# EAGLE board saint lcd (EAGLE 9.4.2)
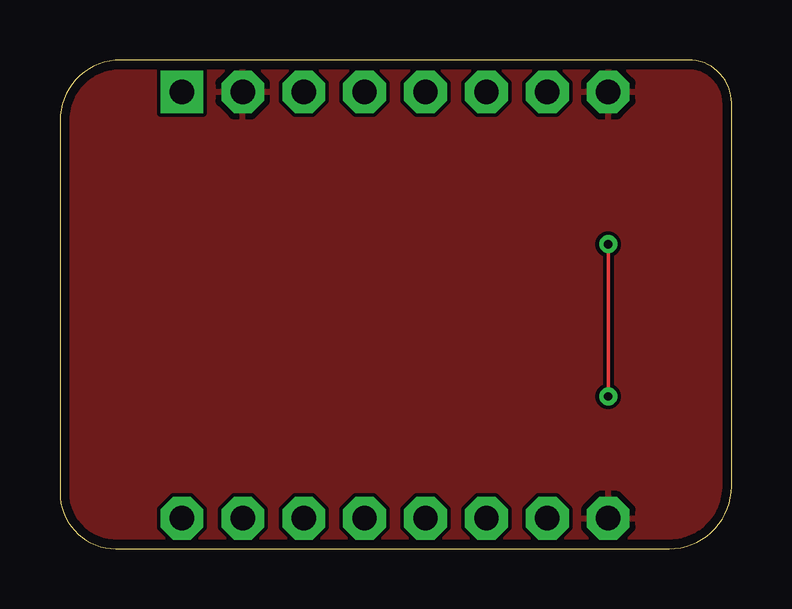
[diagram p0: board, top side]
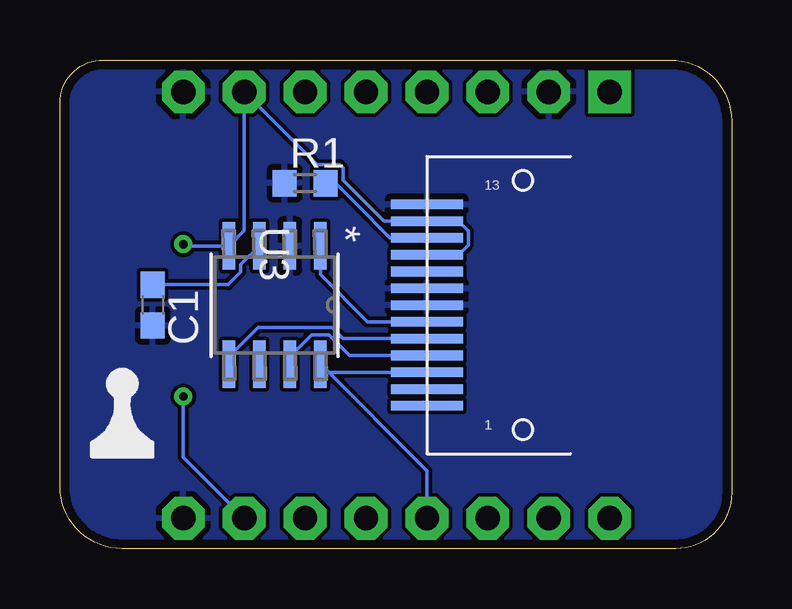
[diagram p1: board, bottom side, seen from below]

Size 28 x 20.38 mm. Coordinates in mm from the lower left corner, seen from the top.
Outline: 26.21,20.38 2.54,20.38 arc90 0,17.84 0,2.33 arc90 2.33,0 25.4,0 arc90 28,2.6 28,18.59 arc90 26.21,20.38
Copper layers (1*16): Top 0.035mm / dielectric 1.5mm / Bottom 0.035mm
Design rules "default *": minimum track width 6mil, minimum drill 0.35mm, track to track 6mil, track to pad 6mil, pad to pad 6mil, via to via 6mil, smd to smd 6mil, copper to edge 15mil, drill to drill 6mil, minimum pad ring 10mil, minimum via ring 8mil, stop-mask expansion 4mil, vias tented up to drill 0mil, thermal gap 10mil

## Footprints (pad centres in the part's own frame; a part is rotated, then mirrored left to right if it is on the bottom)
C0603 = smd 1.1 x 1: 1 -0.85,0; 2 0.85,0
R0603 = smd 1 x 1.1: 1 -0.85,0; 2 0.85,0
SOD8N_4P9X6 = smd 1.981 x 0.533: 1 -2.464,1.905; 2 -2.464,0.635; 3 -2.464,-0.635; 4 -2.464,-1.905; 5 2.464,-1.905; 6 2.464,-0.635; 7 2.464,0.635; 8 2.464,1.905
BADGE64-FOOTPRINT = drill 1.016 pad 1.778 octagon: +3V3-P7 15.24,0; +3V3-P15 15.24,-17.78; CS 12.7,0; GND-P2 2.54,0; GND-P8 17.78,0; GND-P16 17.78,-17.78; MISO 5.08,0; MOSI 10.16,0; NC-P9 0,-17.78; NC-P10 2.54,-17.78; NC-P11 5.08,-17.78; NC-P12 7.62,-17.78; SCK 7.62,0; SCL 10.16,-17.78; SDA 12.7,-17.78 | drill 1.016 pad 1.778 square: +5V 0,0
FPC13 = smd 3 x 0.4: P$1 0,-4.2; P$2 0,-3.5; P$3 0,-2.8; P$4 0,-2.1; P$5 0,-1.4; P$6 0,-0.7; P$7 0,0; P$8 0,0.7; P$9 0,1.4; P$10 0,2.1; P$11 0,2.8; P$12 0,3.5; P$13 0,4.2

## Placement (x,y rotation side)
C1  [C0603]  24.13,10.16 270 bottom
R1  22  [R0603]  17.78,15.24 0 bottom
U3  STM8S001J3  [SOD8N_4P9X6]  19.05,10.16 270 bottom
U$1  BADGE64FOOTPRINT  [BADGE64-FOOTPRINT]  5.08,19.05 0 top
U$2  FPC13  [FPC13]  12.7,10.16 0 bottom
U$3  PLUM  [PLUM]  25.4,3.81 0 bottom

## Library data of the parts
C1 R1 = resistor
U3 = grange; MANUFACTURER_PART_NUMBER: STM8S001J3; VENDOR: STMicroelectronics
U$1 = MiniBadge
U$2 U$3 = grange

## Nets
+3V3: U3.4 U$1.+3V3-P7 U$1.+3V3-P15 U$2.P$10 U$2.P$12
+5V: U$1.+5V
DC: U3.5 U$2.P$5
GND: C1.2 R1.1 U3.2 U$1.GND-P2 U$1.GND-P8 U$1.GND-P16 U$2.P$7 U$2.P$8 U$2.P$13
MOSI: U3.8 U$1.NC-P12 U$2.P$3
N$1: R1.2 U$2.P$11
N$2: C1.1 U3.3
RST: U3.1 U$2.P$6
SCLK: U3.7 U$2.P$4

## Tracks (layer width: path | path; a pad name or v marks a point on that pad's centre or on a via)
+3V3  (via drill 0.35)
  Top 0.152: v22.86,12.7 v22.86,6.35
  Bottom 0.152: v22.86,12.7 22.78,12.62 U3.4 20.32,13.26 U$1.+3V3-P7 17.29,16.02 16.34,16.02 16.2,15.88 16.2,15.36 14.5,13.66 U$2.P$12 | v22.86,6.35 22.86,3.81 U$1.+3V3-P15 | 14.02,13.66 U$2.P$12 | U$2.P$10 12.64,12.32 11.3,12.32 11.3,12.33 10.97,12.66 10.97,13.26 11.3,13.59 11.37,13.66 U$2.P$12
DC
  Bottom 0.152: U$2.P$5 16.2,8.76 16.66,9.22 19.74,9.22 20.95,8.01 U3.5
GND
  pour Bottom: -1.27,-2.54 -1.27,20.32 1.27,22.86 27.94,22.86 30.48,20.32 30.48,17.78 30.48,0 27.94,-2.54
  pour Top: -1.27,19.05 1.27,21.59 27.94,21.59 29.21,20.32 29.21,0 27.94,-1.27 1.27,-1.27 -1.27,1.27
MOSI
  Bottom 0.152: U$2.P$3 16.81,7.36 U3.8 12.7,3.25 U$1.NC-P12
N$1
  Bottom 0.152: R1.2 16.51,15.24 15.24,13.97 14.63,13.36 14.23,12.96 U$2.P$11
N$2
  Bottom 0.152: U3.3 20.46,11.85 20.46,11.54 20.99,11.01 C1.1
RST
  Bottom 0.152: U3.1 17.14,11.43 15.18,9.46 U$2.P$6
SCLK
  Bottom 0.152: U$2.P$4 15.93,8.06 16.78,8.91 17.51,8.91 18.41,8.01 U3.7